# Altium PCB PCB1.PcbDoc
Units mm, origin at the board's own origin, x right, y up, seen from the top; angles counter-clockwise.
Board outline 126.29 x 94.61 mm, 2 copper layers (Top Layer, Bottom Layer); 38 components, 36 nets, 156 pads, 0 vias.
Unrouted connection lines stored in the file: 1.
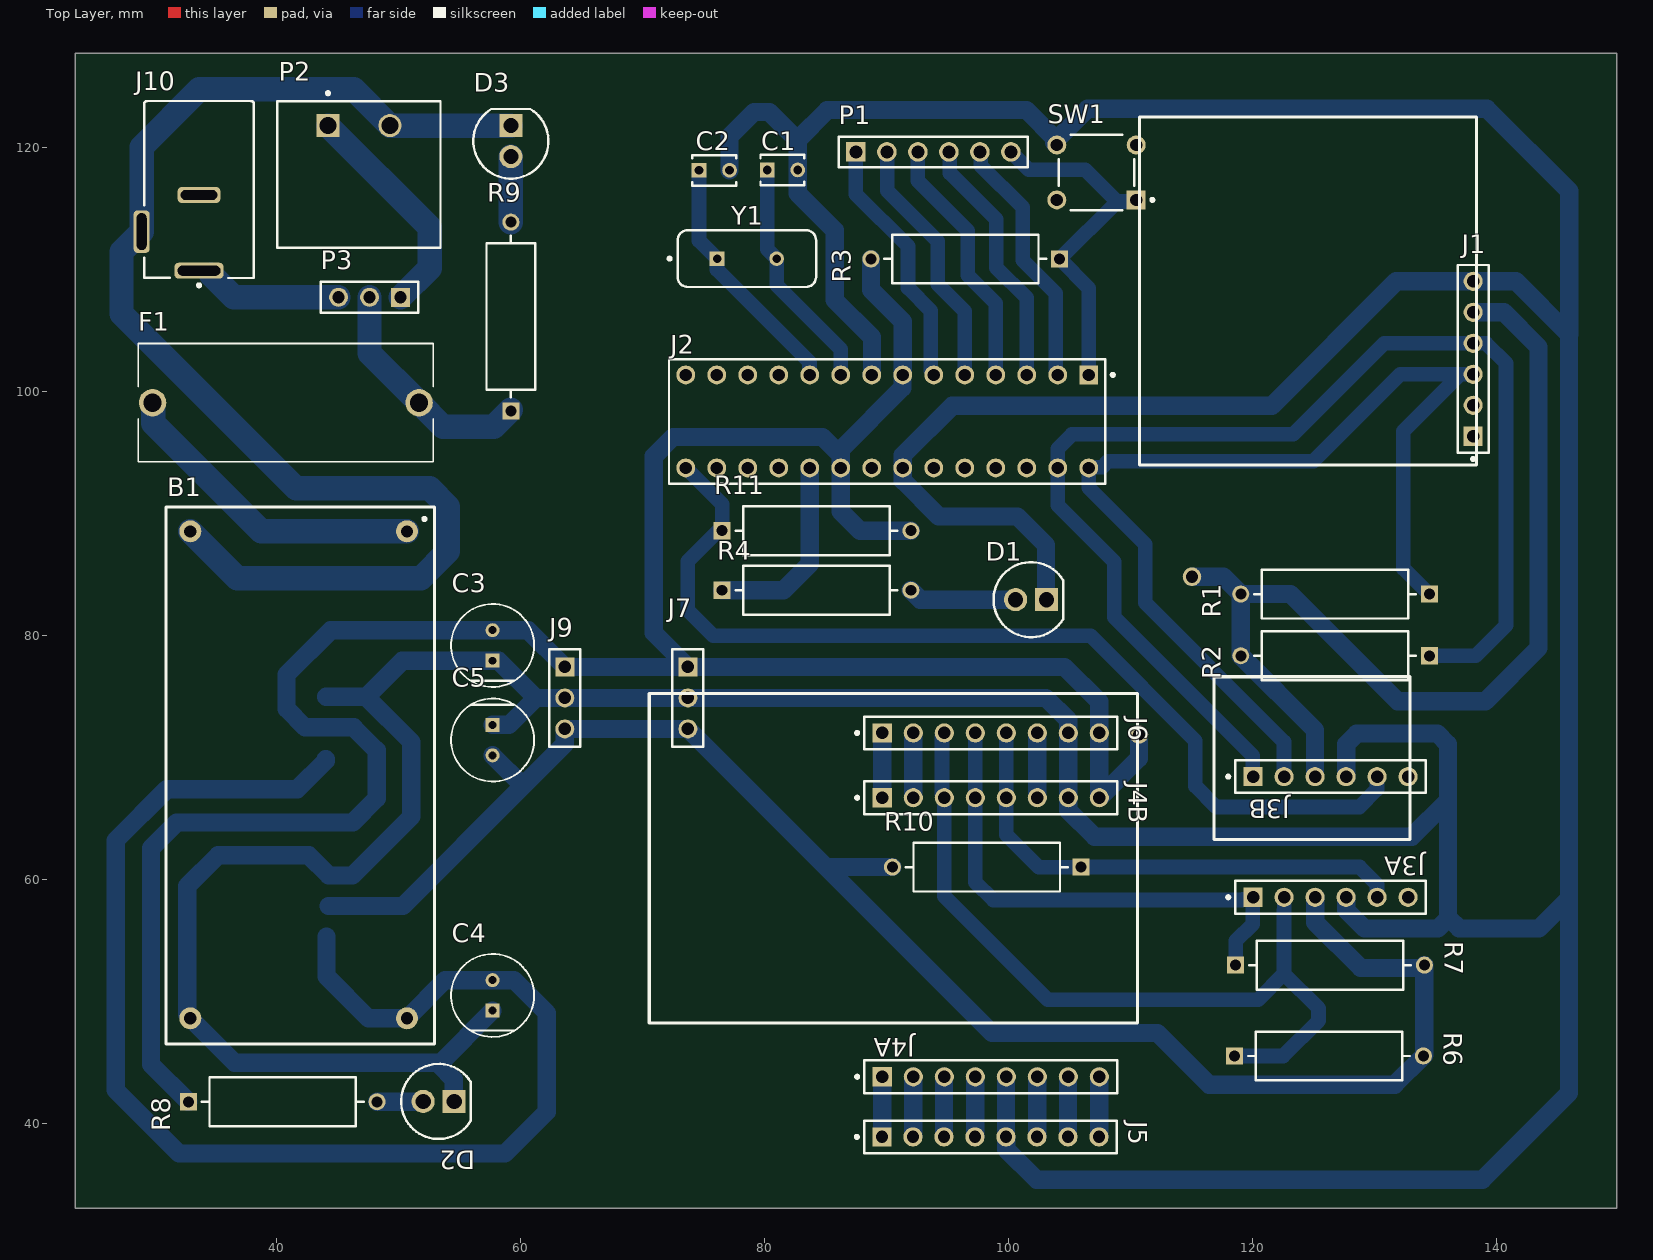
[diagram p0: Top Layer view]
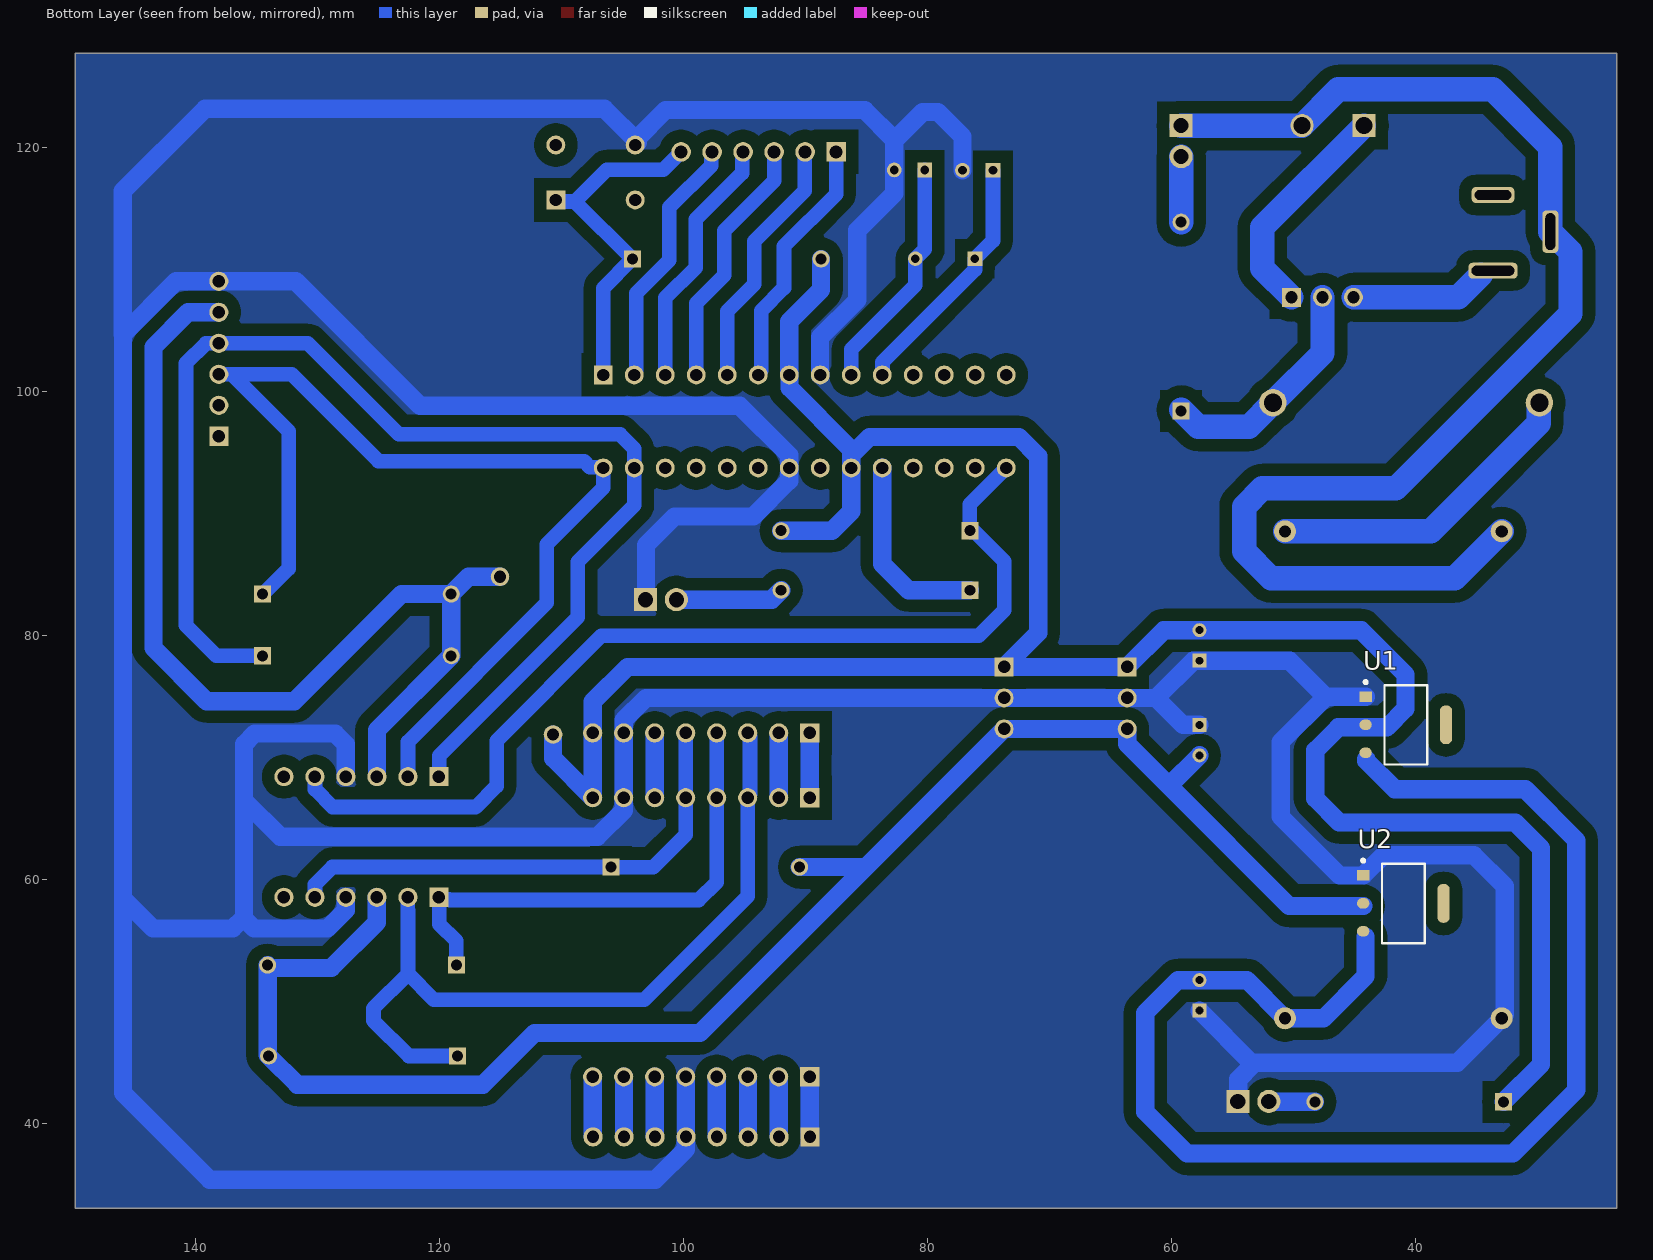
[diagram p1: Bottom Layer view, seen from below]
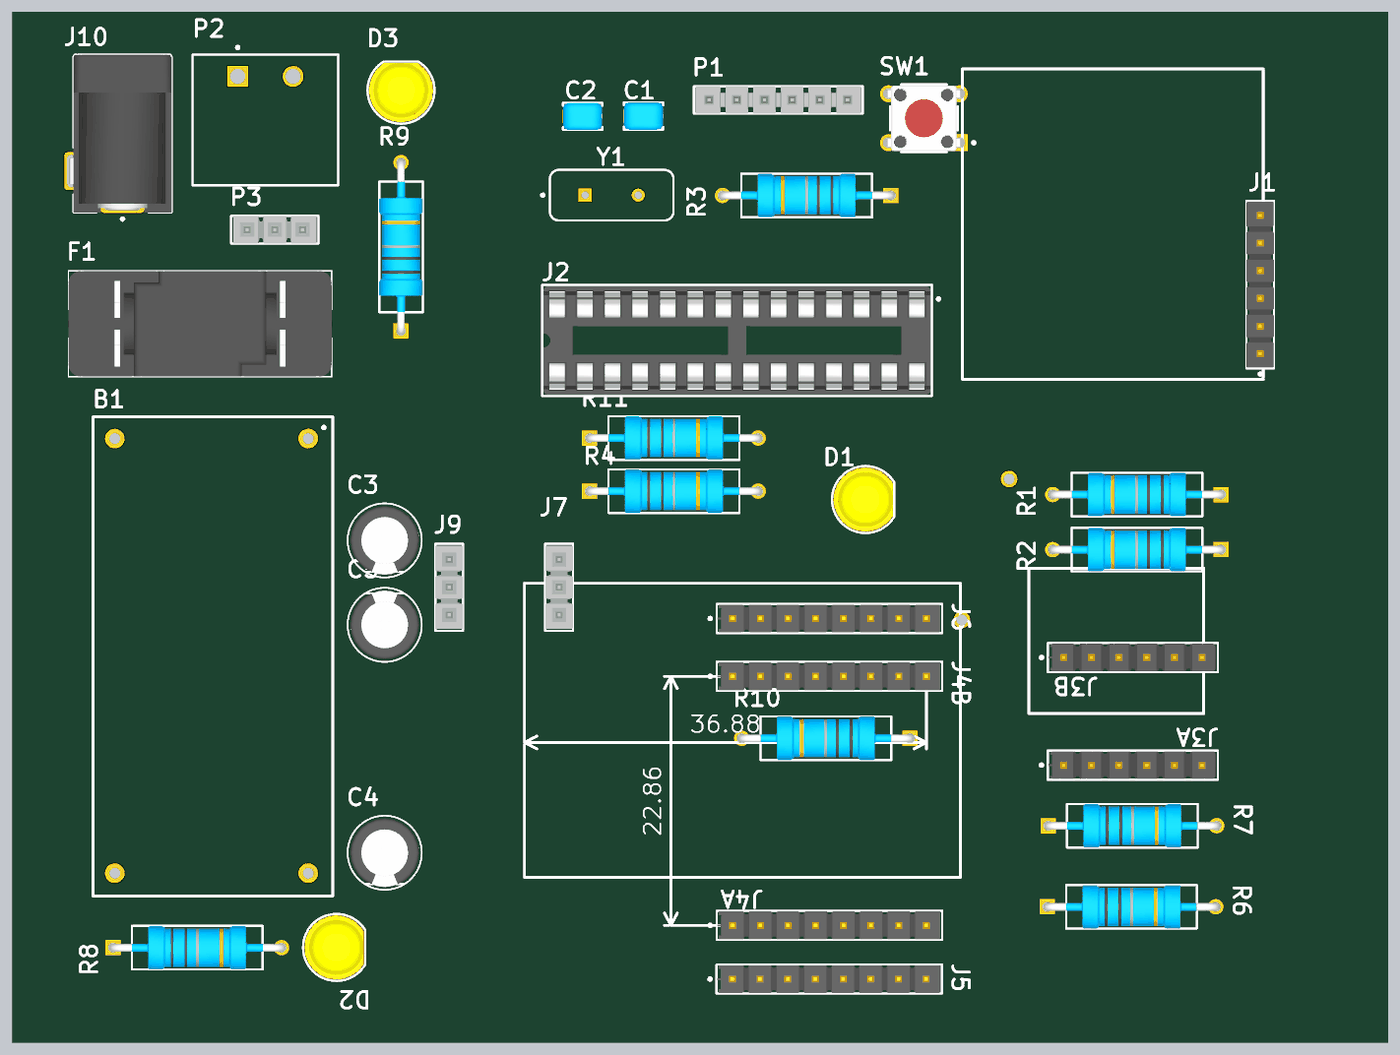
[diagram p2: 3D render of the assembled board from above, using the file's embedded part models]

## Layer stack, top to bottom
Top Solder: solder mask 0.0102, Solder Resist, Dk 3.5
Top Layer: signal copper 0.0356
Dielectric 1: dielectric 0.32, FR-4, Dk 4.8
Bottom Layer: signal copper 0.0356
Bottom Solder: solder mask 0.0102, Solder Resist, Dk 3.5

## Board outline
23.52,33.071 149.809,33.071 149.809,127.686 23.52,127.686

## Design rules (kind name [scope] priority, off if disabled: settings)
Clearance Clearance_1 [All] p1 off: gap=0.254 ignorepadtopadclearanceinfootprint=FALSE
Clearance [All] p2: gap=0.254 ignorepadtopadclearanceinfootprint=FALSE except(1: Arc-Poly Track-Poly SMDPad-Poly THPad-Poly Via-Poly Fill-Poly Poly-Poly)
PolygonConnect [All] p1: connectstyle=Direct reliefconductorwidth=0.254 reliefentries=4 polygonreliefangle="90 Angle" airgapwidth=0.254
RoutingVias [All] p1: holewidth=0.711 width=1.27 viastyle="Through Hole" minholewidth=0.711 minwidth=1.27 maxholewidth=0.711 maxwidth=1.27
SolderMaskExpansion [All] p1: expansion=0.102 istentingtop=FALSE
SupplyNets "Schematic Supply Nets_2" [InNet('+5')] p1: voltage=0.000
SupplyNets "Schematic Supply Nets_1" [InNet('GND')] p2: voltage=0.000
SupplyNets "Schematic Supply Nets" [InNet('+3.3')] p3: voltage=0.000
Width [All] p1 off: maxlimit=2 minlimit=0.254 preferedwidth=2 toplayer_maxwidth=0.254 toplayer_prefwidth=0.254 bottomlayer_minwidth=2 minimp=50.000000 maximp=50.000000 favimp=50.000000
30 further rules are at their usual default settings.

## Classes and differential pairs
component class Sheet2: B1 C3 C4 C5 D2 D3 F1 J9 J10 P2 P3 R8 R9 U1 U2
component class Sheet1: C1 C2 D1 J1 J2 J3A J3B J4A J4B J5 J6 J7 R1 R2 R3 R4 R6 R7 R10 R11 SW1 Y1

## Components (designator, comment, footprint, x,y, rotation, side; value= is the part's Value field where it differs from the comment)
B1 "MINI360_BUCK" MINI360_BUCK 32.944,88.519 r0 top
C1 "RCE5C1H220J0DBH03A" FP-RCE0DB-MFG 81.459,118.127 r0 top
C2 "RCE5C1H220J0DBH03A" FP-RCE0DB-MFG 75.871,118.102 r0 top
C3 "EEAFC1V270" FP-RAD-TH-D_6_3_0_5-L_7_1-MFG 57.709,79.169 r90 top
C4 "EEAFC1V270" FP-RAD-TH-D_6_3_0_5-L_7_1-MFG 57.709,50.495 r90 top
C5 "EEAFC1V270" FP-RAD-TH-D_6_3_0_5-L_7_1-MFG 57.709,71.419 r270 top
D1 "SSL-LX5093YD" FP-SSL-LX5093YD-MFG 101.83,82.923 r180 top
D2 "SSL-LX5093YD" FP-SSL-LX5093YD-MFG 53.289,41.808 r180 top
D3 "SSL-LX5093YD" FP-SSL-LX5093YD-MFG 59.207,120.498 r270 top
F1 "4527" FUSE_4527 40.767,99.06 r180 top
J1 "HTSW-106-07-G-S" FP-HTSW-106-07-G-S-MFG 138.05,102.659 r90 top
J2 "1-2199298-9" FP-1-2199298-9-MFG 90.043,97.528 r180 top
J3A "TSW-106-22-G-S" FP-TSW-106-22-G-S-MFG 126.366,58.539 r0 top
J3B "TSW-106-22-G-S" FP-TSW-106-22-G-S-MFG 126.366,68.42 r0 top
J4A "TSW-108-08-G-S" FP-TSW-108-08-G-S-MFG 98.528,43.832 r0 top
J4B "TSW-108-08-G-S" FP-TSW-108-08-G-S-MFG 98.528,66.692 r0 top
J5 "TSW-108-08-G-S" FP-TSW-108-08-G-S-MFG 98.502,38.905 r0 top
J6 "TSW-108-08-G-S" FP-TSW-108-08-G-S-MFG 98.528,72.001 r0 top
J7 "TSW-103-07-T-S" SMTC-TSW-103-07-X-S 73.712,77.411 r270 top
J9 "TSW-103-07-T-S" SMTC-TSW-103-07-X-S 63.627,77.411 r270 top
J10 "KLDX-0202-A" KYCN-KLDX-0202-A_V 33.655,116.078 r90 top
P1 "PHT-106-01-L-S" SMTC-PHT-106-01-X-S 87.478,119.609 r0 top
P2 "231-532/001-000" WAGO-231-532-001-000_V 46.761,121.768 r0 top
P3 "TSW-103-07-T-S" SMTC-TSW-103-07-X-S 50.165,107.696 r180 top
R1 "VR37000001204JA100" FP-VR37-MFG 126.739,83.38 r180 top
R2 "VR37000001204JA100" FP-VR37-MFG 126.739,78.326 r180 top
R3 "VR37000001204JA100" FP-VR37-MFG 96.437,110.838 r180 top
R4 "VR37000001204JA100" FP-VR37-MFG 84.252,83.693 r0 top
R6 "VR37000001204JA100" FP-VR37-MFG 126.239,45.534 r0 top
R7 "VR37000001204JA100" FP-VR37-MFG 126.324,52.976 r0 top
R8 "VR37000001204JA100" FP-VR37-MFG 40.513,41.783 r0 top
R9 "VR37000001204JA100" FP-VR37-MFG 59.207,106.121 r90 top
R10 "VR37000001204JA100" FP-VR37-MFG 98.196,61.011 r180 top
R11 "VR37000001204JA100" FP-VR37-MFG 84.252,88.57 r0 top
SW1 "B3F-1006" FP-B3F-1006-MFG 107.189,117.924 r0 top
U1 "AMS1117-5" FP-AMS1117-IPC_C 40.792,72.669 r180 bottom
U2 "AMS1117-3.3" FP-AMS1117-IPC_C 40.996,58.039 r180 bottom
Y1 "FOXSLF/160-20" FOX-FOXSLF160-20 78.538,110.863 r0 top

## Footprints (in the part's own frame and the unit in brackets; to place one, negate y for a bottom-side part, rotate by r counter-clockwise, add the part's x,y. Pads: shape width x height; smd on the part's side, far side on the other; paste and mask are expansions set on the pad)
FOX-FOXSLF160-20 [mm] "THD, 2-Leads, Body 11.35x4.65mm"
  rect 1.2x1.2 hole 0.7: 1(-2.44,0)
  round 1.2 hole 0.7: 2(2.44,0)
  silkscreen extent -6.45,-2.32 5.68,2.32, body extent -5.67,-2.32 5.68,2.33, height 3.6
FP-1-2199298-9-MFG [mm]
  rect 1.55x1.55 hole 1 paste-2539.97 mask+0: 1(-16.51,-3.81)
  round 1.55 hole 1 paste-2539.97 mask+0: 2(-13.97,-3.81) 3(-11.43,-3.81) 4(-8.89,-3.81) 5(-6.35,-3.81) 6(-3.81,-3.81) 7(-1.27,-3.81) 8(1.27,-3.81) 9(3.81,-3.81) 10(6.35,-3.81) 11(8.89,-3.81) 12(11.43,-3.81) 13(13.97,-3.81) 14(16.51,-3.81) 15(16.51,3.81) 16(13.97,3.81) 17(11.43,3.81) 18(8.89,3.81) 19(6.35,3.81) 20(3.81,3.81) 21(1.27,3.81) 22(-1.27,3.81) 23(-3.81,3.81) 24(-6.35,3.81) 25(-8.89,3.81) 26(-11.43,3.81) 27(-13.97,3.81) 28(-16.51,3.81)
  silkscreen extent -18.61,-5.1 17.88,5.1, body extent -17.98,-5.2 17.98,5.2, height 0.25
FP-AMS1117-IPC_C [mm]
  rect 1.004x0.872 smd paste+0 mask+0: 1(-3.295,2.29)
  rrect100% 1.004x0.872 smd paste+0 mask+0: 2(-3.295,0) 3(-3.295,-2.29)
  rrect87% 1.004x3.182 smd paste+0 mask+0: 4(3.295,0)
  silkscreen extent -3.42,-3.25 1.75,3.62, body extent -3.53,-3.25 3.53,3.25, height 1.8
FP-B3F-1006-MFG [mm]
  rect 1.55x1.55 hole 1 paste-2539.97 mask+0: 1(3.25,-2.25)
  round 1.55 hole 1 paste-2539.97 mask+0: 2(-3.25,-2.25) 3(3.25,2.25) 4(-3.25,2.25)
  silkscreen extent -3.1,-3.1 4.7,3.1, body extent -4.13,-3.2 4.13,3.2, height 0.25
FP-HTSW-106-07-G-S-MFG [mm]
  rect 1.57x1.57 hole 1.02 paste-2539.97 mask+0: 1(-6.35,0)
  round 1.57 hole 1.02 paste-2539.97 mask+0: 2(-3.81,0) 3(-1.27,0) 4(1.27,0) 5(3.81,0) 6(6.35,0)
  silkscreen extent -8.33,-1.27 7.68,1.27, body extent -7.78,-1.37 7.78,1.37, height 0.25
FP-RAD-TH-D_6_3_0_5-L_7_1-MFG [mm]
  rect 1.15x1.15 hole 0.65 paste-2539.97 mask+0: 1(-1.25,0)
  round 1.15 hole 0.65 paste-2539.97 mask+0: 2(1.25,0)
  silkscreen extent -3.4,-3.4 3.4,3.4, body extent -3.5,-3.5 3.5,3.5, height 0.25
FP-RCE0DB-MFG [mm]
  rect 1.2x1.2 hole 0.7 paste-2539.97 mask+0: 1(-1.25,0)
  round 1.2 hole 0.7 paste-2539.97 mask+0: 2(1.25,0)
  silkscreen extent -1.8,-1.25 1.8,1.25, body extent -1.95,-1.35 1.95,1.35, height 0.25
FP-SSL-LX5093YD-MFG [mm]
  rect 1.9x1.9 hole 1.25 paste-2539.97 mask+0: 1(-1.27,0)
  round 1.9 hole 1.25 paste-2539.97 mask+0: 2(1.27,0)
  silkscreen extent -2.63,-3.07 3.07,3.07, body extent -3.17,-3.17 3.17,3.17, height 0.25
FP-TSW-106-22-G-S-MFG [mm]
  rect 1.57x1.57 hole 1.02 paste-2539.97 mask+0: 1(-6.35,0)
  round 1.57 hole 1.02 paste-2539.97 mask+0: 2(-3.81,0) 3(-1.27,0) 4(1.27,0) 5(3.81,0) 6(6.35,0)
  silkscreen extent -8.51,-1.34 7.81,1.34, body extent -7.91,-1.44 7.91,1.44, height 0.25
FP-TSW-108-08-G-S-MFG [mm]
  rect 1.57x1.57 hole 1.02 paste-2539.97 mask+0: 1(-8.89,0)
  round 1.57 hole 1.02 paste-2539.97 mask+0: 2(-6.35,0) 3(-3.81,0) 4(-1.27,0) 5(1.27,0) 6(3.81,0) 7(6.35,0) 8(8.89,0)
  silkscreen extent -11.07,-1.34 10.35,1.34, body extent -10.45,-1.44 10.45,1.44, height 0.25
FP-VR37-MFG [mm]
  rect 1.4x1.4 hole 0.9 paste-2539.97 mask+0: 1(-7.73,0)
  round 1.4 hole 0.9 paste-2539.97 mask+0: 2(7.73,0)
  silkscreen extent -6.63,-2 6.63,2, body extent -8.53,-2.1 8.53,2.1, height 0.25
FUSE_4527 [mm]
  round 2.25 hole 1.5: 1(-10.92,0) 2(10.92,0)
  silkscreen extent -12.08,-4.85 12.08,4.85, body extent -12.08,-4.85 12.08,4.85, height 10.79
KYCN-KLDX-0202-A_V [mm] "Power Jack, 3-Leads, Body 14.5x9mm"
  rrect50% 1.3x4 hole 0.8 slot 3.5 at 90 deg: 1(-6.2,0)
  rrect50% 1.3x3.5 hole 0.8 slot 3 at 90 deg: 2(0,0)
  rrect50% 3.5x1.3 hole 0.8 slot 3 at 0 deg: 3(-3,4.7)
  silkscreen extent -7.52,-4.5 7.7,4.5, body extent -6.8,-4.5 7.7,4.9, height 10.8
MINI360_BUCK [mm]
  round 1.8 hole 1: 0(17.75,0) 1(0,0) 2(0,-39.9) 3(17.75,-39.9)
  silkscreen extent -2,-42 20,2
SMTC-PHT-106-01-X-S [mm] "Press Fit Socket Assembly, 1x6 Pins, Vertical, 2.54mm Pitch, Male"
  rect 1.6x1.6 hole 1.081: 1(0,0)
  round 1.6 hole 1.081: 2(2.54,0) 3(5.08,0) 4(7.62,0) 5(10.16,0) 6(12.7,0)
  silkscreen extent -1.4,-1.24 14.1,1.24, body extent -1.26,-1.25 13.96,1.25, height 8.38
SMTC-TSW-103-07-X-S [mm] ".025 SQ Post Terminal Strip Assembly, 1x3 Pins, Vertical, 2.54mm Pitch, Male"
  rect 1.55x1.55 hole 1.02: 1(0,0)
  round 1.55 hole 1.02: 2(2.54,0) 3(5.08,0)
  silkscreen extent -1.46,-1.27 6.54,1.27, body extent -1.27,-1.27 6.35,1.27, height 8.38
WAGO-231-532-001-000_V [mm] "CONN, 2-Leads, Body 13.36x12mm, Pitch 5.08mm"
  rect 1.9x1.9 hole 1.4 unplated: 1(-2.54,0)
  round 1.9 hole 1.4 unplated: 2(2.54,0)
  silkscreen extent -6.68,-10 6.68,2.77, body extent -6.68,-10 6.68,2, height 8.4

## Part data
C1 C2: library part CMP-06035-057691-1, "Cap Ceramic 22pF 50V C0G ±5% Radial 2.5mm +125°C Ammo Pack", Capacitance=22pF, Case/Package=Radial, Dielectric=C0G, Max Operating Temperature=125°C, Min Operating Temperature=-55°C, Package Quantity=2000, Ratings=AEC-Q200, Resistor Type=Ceramic, Tolerance=5%, Voltage Rating=50V, Height=3.5mm, Height - Seated (Max)=0.138inch, Lead Diameter=0.5mm, Lead Pitch=0.098inch, Lead/Base Style=Straight, Length=0.142inch, Mount="Through Hole", Packaging="Tape and Reel", Termination=Radial, Voltage Rating (DC)=50V, Width=0.098inch
C3 C4 C5: library part CMP-05427-002000-1, "Aluminum Electrolytic Capacitors (Radial Lead Type) AEC-Q200 Qualified 27uF ±20% 35V", Capacitance=27uF, Case/Package=Radial, ESR (Equivalent Series Resistance)=450mR, Leakage Current=3uA, Max Operating Temperature=105°C, Min Operating Temperature=-55°C, Package Quantity=200, Ripple Current=200mA, Tolerance=20%, Voltage=35V, Construction=RADIAL, Diameter=6.3mm, Height=7mm, Lead Diameter=0.45mm, Lead Pitch=2.5mm, Length=7mm, Life (Hours)=1000Hour, Mount="Through Hole", Packaging=Bulk, Radiation Hardening=No, RoHS Compliant=Yes, Series=FC, Termination=Radial, Voltage Rating=35V, Voltage Rating (DC)=35V
D1 D2 D3: library part CMP-57192-000007-1, "LED YELLOW DIFFUSED T-1 3/4 T/H", Case/Package=Radial, Color=Yellow, Forward Current=20mA, Forward Voltage=2.1V, Max Operating Temperature=85°C, Min Operating Temperature=-40°C, Package Quantity=1000, Diameter=5mm, Dominant Wavelength=568nm, Height=8.6mm, Illumination Color=Yellow, Lead Free="Lead Free", Length=0.5inch, Lens Color=Yellow, Lens Style=Dome, Lens Transparency=Diffused, Luminous Intensity=30mcd, Mount="Through Hole", Number of LEDs=1, Number of Pins=2, Packaging=Bulk, REACH SVHC="No SVHC", RoHS Compliant=Yes, Series=-, Test Current=20mA, Viewing Angle=60°, Wavelength=585nm, Weight=0.01lb, Width=1.5inch
F1: "5mm Low Profile Holder", Package=None, Availability="In Stock", Check_prices=https://www.snapeda.com/parts/4527/Keystone+Electronics/view-part/?ref=eda, MF=Keystone, MP=4527, Price=None, Purchase-URL=https://pricing.snapeda.com/search/part/4527/?ref=eda, SnapEDA_Link=https://www.snapeda.com/parts/4527/Keystone+Electronics/view-part/?ref=snap
J1: library part CMP-02766-001515-1, "CONN HEADER VERT 6POS 2.54MM", Color=Natural, Flammability Rating="UL94 V-0", Max Current Rating=7.6A, Max Operating Temperature=125°C, Max Voltage Rating (AC)=550V, Min Operating Temperature=-55°C, Connector Type=Header, Contact Finish - Mating=GOLD, Contact Material=Bronze, Contact Mating Length=0.23inch, Contact Plating=Gold, Contact Shape=Square, Contact Type="Male Pin", Depth=2.48mm, Fastening Type=Pull, Gender=Male, Housing Color=Natural, Housing Material=Polymer, Insulation Color=Natural, Insulation Material=Polymer, Lead Free="Lead Free", Length=15.24mm, Mount="Through Hole", Number of Contacts=6, Number of Positions=6, Number of Rows=1, Orientation=Straight, Packaging=Rail/Tube, Pitch=0.1inch, Radiation Hardening=No, REACH SVHC="No SVHC", RoHS Compliant=Yes, Series=HTSW, Termination=Solder
J2: library part CMP-03370-000006-1, "CONN IC DIP SOCKET 28POS TIN", Color=Black, Contact Current Rating=1A, Flammability Rating="UL94 V-0", Insulation Resistance=1GR, Max Operating Temperature=105°C, Min Operating Temperature=-40°C, Package Quantity=17, Connector Type=Pin, Contact Material=Bronze, Contact Plating=Tin, Contact Post Length=3inch, Current Rating=1A, ELV=Compliant, Housing Material=PBT, Insulation Material=Thermoplastic, Length=1.4inch, Mating Alignment="Yes (With)", Mount="Through Hole", Number of Contacts=28, Number of Poles=28, Number of Positions=28, Number of Rows=2, Orientation=Straight, Packaging=Rail/Tube, Pitch=2.54mm, Radiation Hardening=No, RoHS Compliant=Yes, Row Spacing=0.3inch, Termination="Through Hole"
J3A J3B: library part CMP-02766-000118-1, "CONN HEADER VERT 6POS 2.54MM", Contact Material=Bronze, Contact Plating=Gold, Gender=Male, Mount="Through Hole", Number of Contacts=6, Number of Rows=1, REACH SVHC="No SVHC", Termination=Solder
J4A J4B J5 J6: library part CMP-02766-000001-1, "CONN HEADER VERT 8POS 2.54MM", Manufacturer=Samtec, Temperature="-55°C to +125°C", Temperature Range High=+125°C, Temperature Range Low=-55°C, Automotive=No, Category=Conn, ComponentLink2Description=Datasheet, ComponentLink2URL=http://suddendocs.samtec.com/catalog_english/tsw_th.pdf, Conn Gender=Male, Conn Orientation=Straight, Contact Material=Gold,Nickel, Device Class L1=Connectors, Device Class L2="Headers and Wire Housings", Device Class L3=unset, Digikey Description="CONN HEADER VERT 8POS 2.54MM", Footprint Url=http://suddendocs.samtec.com/prints/tsw-xxx-xx-x-x-xx-xxx-footprint.pdf, Height=8.71mm, Lead Free=Yes, Manufacturer Part Number=TSW-108-08-G-S, Mouser Description="TSW - Samtec 2.54mm Pin Header 13.46mm Overall Pin Length 5.08mm Tail", Number of Contacts=8, Number of Rows=1, Octopart=https://octopart.com/tsw-108-08-g-s-samtec-272653, Package=TSW-108-08-G-S, Pitch=2.54mm, RoHS=TRUE
J7 J9 P3: library part CMP-1024-00332-1, "0.025\" SQ Post Header, Through-hole, Vertical, -55 to 105 degC, 2.54 mm Pitch, 3-Pin, Male, RoHS", Manufacturer=Samtec, Temperature Range="-55 to 105 degC", ComponentLink1Description="Manufacturer URL", ComponentLink1URL=http://www.samtec.com, ComponentLink2Description=Datasheet, ComponentLink2URL=http://www.samtec.com/documents/webfiles/pdf/TSW_TH.PDF, ComponentLink3Description="Package Specification", ComponentLink3URL=http://www.samtec.com/documents/webfiles/cpdf/TSW-XXX-XX-XXX-X-XX-XXX-MKT.pdf, DatasheetVersion=F-214, Mounting Technology=Through-hole, Orientation=Vertical, PackageDescription=".025[0.64] SQ. Post Terminal Strip Assembly", PackageReference=TSW-103-07-X-S, PackageVersion="DM, 8/1988", PartNumber=TSW-103-07-T-S, Pitch="2.54 mm", RoHS=True
J10: library part CMP-1673-00001-5, "DC Power Jack, 24 V, 3.5 A, -25 to 85 degC, 3-Pin THD, RoHS", Colour=Black, Current Rating="3.5 A", Manufacturer=Kycon, Max Operating Temperature="85 degC", Min Operating Temperature="-25 degC", Package Quantity=500, Voltage Rating="24 V", ComponentLink1Description="Manufacturer URL", ComponentLink1URL=http://www.kycon.com/, ComponentLink2Description=Datasheet, ComponentLink2URL=http://www.kycon.com/Pub_Eng_Draw/KLDX-0202-X.PDF, Connector Type=Power, Contact Gender=Female, Contact Material=Brass, Contact Plating=Tin, DatasheetVersion="Rev. D3, 06/2013", Height="10.8 mm", Housing Material=PBT, Length="9.2 mm", Mount="Through Hole", Mounting Technology="Through Hole", PackageDescription="3-Pin Through Hole Device, Body 14.5 x 9 mm", PackageReference=KLDX-0202-A, Pins=2, RoHSCompliant=true
P1: library part CMP-1024-00187-1, "Press Fit Header, Through-hole, Vertical, -55 to 125 degC, 2.54 mm Pitch, 6-Pin, Male, RoHS", Manufacturer=Samtec, Temperature Range="-55 to 125 degC", ComponentLink1Description="Manufacturer URL", ComponentLink1URL=http://www.samtec.com, ComponentLink2Description=Datasheet, ComponentLink2URL=http://www.samtec.com/documents/webfiles/pdf/pht.pdf, ComponentLink3Description="Package Specification", ComponentLink3URL=http://www.samtec.com/documents/webfiles/cpdf/PHT-1XX-XX-X-X-XXX-MKT.pdf, DatasheetVersion=F-214, Mounting Technology=Through-hole, Orientation=Vertical, PackageDescription=".100 Press Fit Socket Assembly", PackageReference=PHT-106-01-X-S, PackageVersion="J, 9/2009", PartNumber=PHT-106-01-L-S, Pitch="2.54 mm", RoHS=True
P2: library part CMP-2000-05540-1, "Male Connector, Right Angle, Pitch 5.08 mm, 1 x 2 Posistion, Height 8.4 mm, -60 to 100 degC, RoHS", Case material=Polyamide6.6, Colour=Orange, Manufacturer=WAGO, Max. temperature=+100°C, Min. temperature=-60°C, Nominal current=12A, Nominal voltage=320V, Package Description="Male Connector, Right Angle, Pitch 5.08 mm, 1 x 2 Posistion, Height 8.4 mm", Package Reference=231-532-001-000, Category=Pinstrip(standard), Connection=Print, Connector orientation=Parallel(tothePCB), Connector Type=Plug,rightangle, Connectors=wire-to-board, Contact Material=Cathodecopper, Contact surface=Tinplated, Content=200pc(s), CS=5.08mm, Datasheet URL=http://www.farnell.com/datasheets/2079603.pdf, Datasheet Version=01/2016, Height=12.2mm, Industrial packaging=Yes, Insulation Material=Polyamide6.6, Length=12mm, Manufacturer part No.=231-532/001-000, Manufacturer URL=http://global.wago.com/en/index-en.jsp, Mounting Technology=ThroughHole, Pins per row=2, Pitch=5.08mm, Series=231, T=12mm, Total number of pins=2, Type=CLOSEDENDMaleConnector1X1HOR.5,, Width=13.36mm
R1 R2 R3 R4 R6 R7 R8 R9 R10 R11: library part CMP-02408-000054-1, "RES 1.2M OHM 5% 1/2W AXIAL", Case/Package=Conformal, Max Operating Temperature=155°C, Min Operating Temperature=-55°C, Power Rating=500mW, Resistance=1.2MR, Resistance Tolerance=5%, Resistor Type="Metal Film", Temperature Coefficient=200ppm/°C, Voltage Rating=3.5kV, Construction=Cylindrical, Contact Plating=Tin, Diameter=4mm, Length=10mm, Military Standard=Not, Mount="Through Hole", Packaging="Ammo Pack", Radiation Hardening=No, Reach SVHC Compliant=Yes, Termination=Axial, Tolerance=5%, Voltage Rating (DC)=3.5kV
SW1: library part CMP-08834-000047-1, "SWITCH TACTILE SPST-NO 0.05A 24V", Actuator Color=Red, Contact Current Rating=50mA, Contact Resistance=100mR, Max Operating Temperature=70°C, Max Voltage Rating (DC)=24V, Min Operating Temperature=-25°C, Operating Force=4.9N, Package Quantity=1500, Ratings=IP00, Actuator Length=0.9mm, Actuator Type=Standard, Contact Material=Gold, Contact Plating=Silver, Current Rating=50mA, Depth=6mm, Electrical Life=50000Cycles, Height=4.3mm, Illumination Type=Non-Illuminated, Lead Free="Lead Free", Length=6mm, Max Current Rating=50mA, Mechanical Life=50000Cycles, Mount="Through Hole", Number of Poles=1, Orientation=Straight, Packaging=Bag, Series=B3F, Switch Function=Off-Mom, Switch Travel=0.25mm, Termination="PC Pins", Throw Configuration=SPST, Voltage Rating (DC)=24V, Weight=0.25g, Width=6mm
U1: library part CMP-209535-000001-1, "LDO Voltage Regulators 1A, 3.3V", Dropout Voltage=1.1V, Manufacturer="Advanced Monolithic Systems", Manufacturer Part Number=AMS1117-3.3, Max Junction Temp=+125°C, Max Power Dissipation=1.2W, Max Supply Voltage=15V, Nominal Supply Current=5mA, Output Current=1A, Output Voltage=3.3V, Package=AMS1117, Temperature="-40°C to +125°C", Temperature Range Low=-40°C, Automotive=No, Category=IC, ComponentLink2Description=Datasheet, ComponentLink2URL=http://www.advanced-monolithic.com/pdf/ds1117.pdf, Device Class L1="Integrated Circuits (ICs)", Device Class L2="Power Management ICs", Device Class L3="Voltage Regulators - Linear", Height=1.8mm, Ipc Land Pattern Name=SOT229P700X180-4, Lead Free=Yes, Number Of Outputs=1, Octopart=https://octopart.com/ams1117-3.3-advanced+monolithic+systems-25899300, Output Type=Fixed, RoHS=TRUE, Standoff Height=0.64mm, Temperature Range High=+125°C
U2: library part CMP-209535-000001-1, "LDO Voltage Regulators 1A, 3.3V", Dropout Voltage=1.1V, Manufacturer="Advanced Monolithic Systems", Max Junction Temp=+125°C, Max Power Dissipation=1.2W, Max Supply Voltage=15V, Nominal Supply Current=5mA, Output Current=1A, Output Voltage=3.3V, Package=AMS1117, Temperature="-40°C to +125°C", Temperature Range Low=-40°C, Automotive=No, Category=IC, ComponentLink2Description=Datasheet, ComponentLink2URL=http://www.advanced-monolithic.com/pdf/ds1117.pdf, Device Class L1="Integrated Circuits (ICs)", Device Class L2="Power Management ICs", Device Class L3="Voltage Regulators - Linear", Height=1.8mm, Ipc Land Pattern Name=SOT229P700X180-4, Lead Free=Yes, Manufacturer Part Number=AMS1117-3.3, Number Of Outputs=1, Octopart=https://octopart.com/ams1117-3.3-advanced+monolithic+systems-25899300, Output Type=Fixed, RoHS=TRUE, Standoff Height=0.64mm, Temperature Range High=+125°C
Y1: library part CMP-1749-00003-1, "Resistance Weld Thru-Hole Crystal, 16 MHz, -20 to 70 degC, 2-Pin THD, RoHS, Bulk", Case\Package=Axial, Max Operating Temperature="155 degC", Min Operating Temperature="-55 degC", Package Quantity=200, Power Rating="250 mW", Resistance="221 kohm", Tolerance=1%, Voltage Rating="250 V", ComponentLink1Description="Manufacturer URL", ComponentLink1URL=http://www.foxonline.com/, ComponentLink2Description=Datasheet, ComponentLink2URL=http://www.foxonline.com/pdfs/hc49slf.pdf, DatasheetVersion=Mar-15, Length="0.248 inch", Mount="Through Hole", PackageDescription="2-Pin Through Hole Device, Body 11.35 x 4.65 mm", PackageReference=FOXSLF160-20, Packaging=Bulk, RoHSCompliant=true

## Free pads (board coordinates)
  round 1.524 hole 1: 10(110.669,71.874) 11(115.012,84.803)

## Nets (pads, with @x,y where several pads share a name; then routed paths per layer and width w, separated by ;. In a path a pad name is that pad's centre, name@x,y a point inside that pad or via, vN(x,y) a via of type N, cw(c..) or ccw(c..) an arc to the next point about the centre after c; other vN are vias at no path point)
3V3: J4A.8 J5.8 | length 4.9
  Bottom Layer w1.5: J5.8 107.392,38.924 107.418,38.949 J4A.8
+3.3: C5.2 J3A.3 J7.3 J9.3 R6.2 R7.2 R10.2 U2.2 | length 138.5
  Bottom Layer w1.5: U2.2@44.291,57.829 50.355,57.829 60.202,67.676 ; C5.2 60.202,67.676 ; R10.2 85.032,61.011 ; J3A.3 125.101,58.534 125.101,56.493 128.847,52.748 133.825,52.748 R7.2 134.054,45.619 R6.2 131.619,43.184 116.423,43.184 112.193,47.414 98.629,47.414 85.032,61.011 ; 60.202,67.676 63.617,71.092 63.617,72.322 J9.3 J7.3 85.032,61.011
+5: C3.2 J1.5 J2.7 J2.20 J3B.3 J4B.8 J6.8 J7.1 J9.1 pad.10 pad.11 R1.2 R2.2 R3.2 R8.1 R11.2 U1.2 | length 290.6
  Bottom Layer w1.5: R8.1 29.718,44.848 29.718,62.554 31.833,64.668 46.253,64.668 48.209,66.624 48.209,70.574 46.323,72.459 42.349,72.459 40.818,73.99 40.818,76.784 44.453,80.419 C3.2 60.619,80.419 J9.1 J7.1 ; 86.243,95.237 91.298,100.292 91.298,101.309 91.313,101.324 J2.7 91.313,105.708 88.707,108.314 R3.2 ; R11.2 87.808,88.57 86.233,90.145 J2.20 86.223,93.728 86.223,94.758 84.739,96.243 72.487,96.243 70.918,94.674 70.918,80.205 J7.1 ; J4B.8 J6.8 107.413,72.006 107.413,74.571 104.573,77.411 J7.1 ; J4B.8@107.427,66.692 110.669,69.934 pad.10 ; pad.11 115.017,84.798 117.591,84.798 R1.2 ; J3B.3 125.096,72.238 R2.2 R1.2 ; J1.5 140.565,106.469 143.41,103.624 143.41,78.961 139.041,74.592 131.878,74.592 123.09,83.38 R1.2
D13: J2.19 R4.1 | length 15.9
  Bottom Layer w1.5: R4.1 81.543,83.693 83.693,85.843 J2.19
DE/RE: J2.6 P1.1 | length 20.9
  Bottom Layer w1.2: P1.1 87.478,116.154 91.745,111.887 91.745,108.458 93.599,106.604 93.599,101.687 93.853,101.433 J2.6
GND: B1.2 C1.2 C2.2 C3.1 C4.1 C5.1 D1.1 D2.1 J1.6 J2.8 J2.22 J3A.4 J3B.4 J4A.1 J4A.5 J4B.7 J5.1 J5.5 J6.7 J7.2 J9.2 SW1.4 U1.1 U2.1 | length 552.1
  Bottom Layer w1.5: U1.1 47.359,74.959 ; 50.976,44.976 36.587,44.976 B1.2 32.944,48.7 32.69,48.954 32.69,59.45 35.215,61.976 42.644,61.976 U2.1 46.232,60.329 51.054,65.151 51.054,71.264 47.359,74.959 ; 51.173,44.976 53.17,44.976 53.305,44.841 ; D2.1 54.559,41.968 54.519,42.008 54.519,43.626 53.305,44.841 ; C4.1 53.305,44.841 ; C5.1 59.055,72.669 61.257,74.871 ; C2.2 77.121,120.86 79.135,122.873 80.377,122.873 82.709,120.542 ; J2.8 88.783,101.348 88.783,101.383 88.788,101.388 88.788,104.423 85.736,107.475 85.736,113.19 82.709,116.217 C1.2 82.709,120.606 85.141,123.038 101.448,123.038 103.93,120.556 103.93,120.184 SW1.4 ; J5.1 89.625,38.917 89.625,43.82 J4A.1 ; J2.22 J2.22@91.323,93.708 ; J4A.5 99.798,43.813 99.772,43.788 J5.5 99.786,38.891 99.786,37.896 102.282,35.4 138.812,35.4 145.91,42.497 145.91,58.448 ; D1.1@103.049,82.923 103.049,87.4 100.716,89.734 94.266,89.734 91.323,92.678 J2.22@91.323,93.708 ; SW1.4@103.711,120.403 106.447,123.139 139.185,123.139 145.924,116.4 145.924,104.674 145.91,104.66 ; J3A.4 127.641,58.534 127.641,57.489 129.157,55.974 135.165,55.974 135.993,56.801 ; J3B.4 127.641,68.425 127.641,71.072 128.52,71.95 135.114,71.95 135.993,71.072 135.993,66.473 ; 47.359,74.959 50.319,77.919 C3.1 58.209,77.919 61.257,74.871 ; 61.257,74.871 J9.2 J7.2 103.053,74.871 104.878,73.046 J6.7 J4B.7 104.878,65.647 107.024,63.501 133.021,63.501 135.993,66.473 ; J2.22@91.323,93.708 91.323,94.758 95.377,98.813 121.555,98.813 131.751,109.009 J1.6 141.56,109.009 145.91,104.66 ; 135.993,56.801 135.993,66.473 ; 135.993,56.801 136.044,56.852 136.922,55.974 143.435,55.974 145.91,58.448 ; 145.91,58.448 145.91,104.66
IN1+: P2.1 P3.1 | length 18.5
  Bottom Layer w2: P2.1 52.553,113.436 52.553,110.084 P3.1
IN1-: B1.1 D3.1 J10.3 P2.2 | length 108.3
  Bottom Layer w2: B1.1 36.779,84.684 51.841,84.684 54.051,86.893 54.051,90.551 52.553,92.05 41.605,92.05 27.305,106.35 27.305,111.428 J10.3 28.955,120.014 33.68,124.739 46.33,124.739 P2.2 D3.1
IN2+: J10.1 P3.3 | length 11.2
  Bottom Layer w2: J10.1@34.655,109.528 36.487,107.696 P3.3
IN_SEL: F1.1 P3.2 R9.1 | length 19.2
  Bottom Layer w2: P3.2 47.625,103.122 F1.1 53.643,97.104 57.819,97.104 59.157,98.442 R9.1@59.182,98.467
Int: J2.15 J3B.5 R11.1 | length 81.3
  Bottom Layer w1.2: J2.15 76.522,90.729 R11.1 76.422,88.47 76.1,88.47 73.685,86.055 73.685,82.042 75.776,79.951 106.707,79.951 115.292,71.366 115.292,67.658 117.019,65.93 128.732,65.93 130.171,67.37 130.171,68.415 J3B.5
Int_3.3: J3A.5 J4B.5 J6.5 R10.1 | length 41.4
  Bottom Layer w1.2: J6.5 J4B.5 99.803,66.687 99.803,63.68 102.472,61.011 R10.1 ; R10.1@105.926,61.015 128.745,61.015 130.171,59.589 130.171,58.544 J3A.5
IO0: J4A.6 J5.6 | length 4.9
  Bottom Layer w1.5: J5.6 102.312,38.924 102.338,38.949 J4A.6
IO1: J4B.1 J6.1 | length 5.3
  Bottom Layer w1.5: J4B.1 J6.1
IO2: J4B.2 J6.2 | length 5.3
  Bottom Layer w1.5: J4B.2 J6.2
IO12: J4B.6 J6.6 | length 5.3
  Bottom Layer w1.5: J4B.6 J6.6
IO16: J4A.7 J5.7 | length 4.9
  Bottom Layer w1.5: J5.7 104.852,43.788 104.878,43.813 J4A.7
NetB1_0: B1.0 F1.2 | length 26.2
  Bottom Layer w2: F1.2 29.895,99.012 29.895,97.385 38.76,88.519 B1.0
NetD1_2: D1.2 R4.2 | length 8.9
  Bottom Layer w1.5: R4.2 92.752,82.923 D1.2@100.515,82.923
NetD2_2: D2.2 R8.2 | length 3.8
  Bottom Layer w1.5: R8.2 51.994,41.783 D2.2
NetD3_2: D3.2 R9.2 | length 5.4
  Bottom Layer w2: R9.2 D3.2
RESET: J2.1 P1.6 R3.1 SW1.1 | length 29.3
  Bottom Layer w1.2: P1.6 101.625,118.161 106.257,118.161 108.873,115.544 ; R3.1@104.067,110.938 R3.1 ; J2.1 106.553,108.451 R3.1 ; SW1.1 110.394,115.674 110.264,115.544 108.873,115.544 ; R3.1 108.873,115.544
RXD: J2.2 P1.5 | length 20.9
  Bottom Layer w1.2: P1.5 97.714,119.532 97.714,118.491 101.143,115.062 101.143,110.744 103.861,108.026 103.861,101.738 103.946,101.652 103.946,101.405 J2.2
RXE: J2.4 P1.3 | length 20.8
  Bottom Layer w1.2: P1.3 92.558,117.246 96.647,113.157 96.647,109.499 98.933,107.213 J2.4@98.933,101.433
SCL: J1.3 J2.28 J3B.2 R1.1 | length 87.5
  Bottom Layer w1.2: J3B.2 122.551,68.425 122.551,71.295 111.177,82.669 111.177,87.47 106.563,92.084 106.563,93.708 J2.28 106.62,93.785 107.65,93.785 108.128,94.263 124.968,94.263 132.094,101.389 J1.3 ; 132.335,85.48 132.335,85.514 ; R1.1 132.335,85.514 ; 137,101.384 132.335,96.719 132.335,85.514
SCL_3.3: J3A.2 J4B.3 J6.3 R6.1 | length 65.1
  Bottom Layer w1.2: J6.3 94.718,71.901 94.528,71.711 94.528,66.983 94.718,66.793 94.718,58.622 103.208,50.132 120.423,50.132 122.551,52.26 ; R6.1 122.48,45.534 125.382,48.436 125.382,49.43 122.551,52.26 ; 122.556,57.484 122.551,57.489 122.551,52.26 ; J3A.2 122.561,58.534 122.561,57.489
SDA: J1.4 J2.27 J3B.1 R2.1 | length 103.3
  Bottom Layer w1.2: J3B.1 119.997,68.439 119.997,70.116 108.637,81.475 108.637,86.035 104.013,90.659 J2.27 104.023,93.708 104.023,95.301 105.184,96.463 123.295,96.463 130.76,103.929 J1.4 138.055,103.924 139.1,103.924 140.743,102.281 140.743,80.815 138.253,78.326 R2.1
SDA_3.3: J3A.1 J4B.4 J6.4 R7.1 | length 41.8
  Bottom Layer w1.2: J6.4 J4B.4 97.263,66.687 97.263,59.785 98.73,58.318 119.128,58.318 119.164,58.354 119.831,58.354 J3A.1 119.981,58.504 119.981,56.345 118.594,54.958 R7.1
TXD: J2.3 P1.4 | length 20.9
  Bottom Layer w1.2: P1.4 95.174,119.532 95.174,117.881 98.984,114.071 98.984,110.134 101.473,107.645 J2.3
TXE: J2.5 P1.2 | length 20.9
  Bottom Layer w1.2: P1.2@90.043,119.609 90.043,116.434 94.183,112.293 94.183,108.763 96.393,106.553 J2.5
U0R: J4A.3 J5.3 | length 4.9
  Bottom Layer w1.5: J5.3 94.692,43.788 94.718,43.813 J4A.3
U0T: J4A.2 J5.2 | length 4.9
  Bottom Layer w1.5: J5.2 92.152,38.924 92.178,38.949 J4A.2
VCC: J4A.4 J5.4 | length 4.9
  Bottom Layer w1.5: J5.4 97.232,38.924 97.258,38.949 J4A.4
VIN: B1.3 C4.2 U1.3 U2.3 | length 112.6
  Bottom Layer w1.5: 44.044,69.85 44.044,69.734 41.696,67.386 31.015,67.386 26.822,63.194 26.822,42.748 32.029,37.541 58.725,37.541 62.154,40.97 62.154,49.047 59.456,51.745 C4.2 53.82,51.745 B1.3 47.545,48.619 44.094,52.07 44.094,55.321
XTAL1: C1.1 J2.9 Y1.2 | length 19.3
  Bottom Layer w1.2: C1.1 80.209,111.632 Y1.2 80.978,108.677 86.233,103.422 J2.9
XTAL2: C2.1 J2.10 Y1.1 | length 20.5
  Bottom Layer w1.2: C2.1 74.621,112.34 Y1.1 76.098,109.964 83.678,102.384 83.678,101.388 83.683,101.383 83.683,101.348 J2.10
pads on no net: J1.1 J1.2 J2.11 J2.12 J2.13 J2.14 J2.16 J2.17 J2.18 J2.21 J2.23 J2.24 J2.25 J2.26 J3A.6 J3B.6 J10.2 SW1.2 SW1.3 U1.4 U2.4

## Polygon pours and split planes (outlines as drawn)
GND on Bottom Layer "GND_L02_P001" (solid, remove dead copper, pour order 1): 23.52,33.071 149.809,33.071 149.809,127.686 23.52,127.686

## Silkscreen, mask and mechanical layers (free items; w line width, h text height)
Top Overlay:
  lines w0.254: 70.541,48.235 110.541,48.235 110.541,75.235 70.541,75.235 70.541,48.235 ; 110.728,93.953 138.328,93.953 138.328,122.453 110.728,122.453 110.728,93.953 ; 116.817,63.276 132.867,63.276 132.867,76.606 116.817,76.606 116.817,63.276

## Dimensions
107.418,66.692 to 70.541,75.235 on Top Overlay
102.338,43.832 to 102.338,66.692 on Top Overlay